# Altium PCB BMS_Carrier_Board.PcbDoc (part 3 of 3)
Units mm, origin at the board's own origin, x right, y up, seen from the top; angles counter-clockwise.
Board outline 80 x 70 mm, 2 copper layers (Top Layer, Bottom Layer); 98 components, 80 nets, 377 pads, 123 vias.
Unrouted connection lines stored in the file: 52.
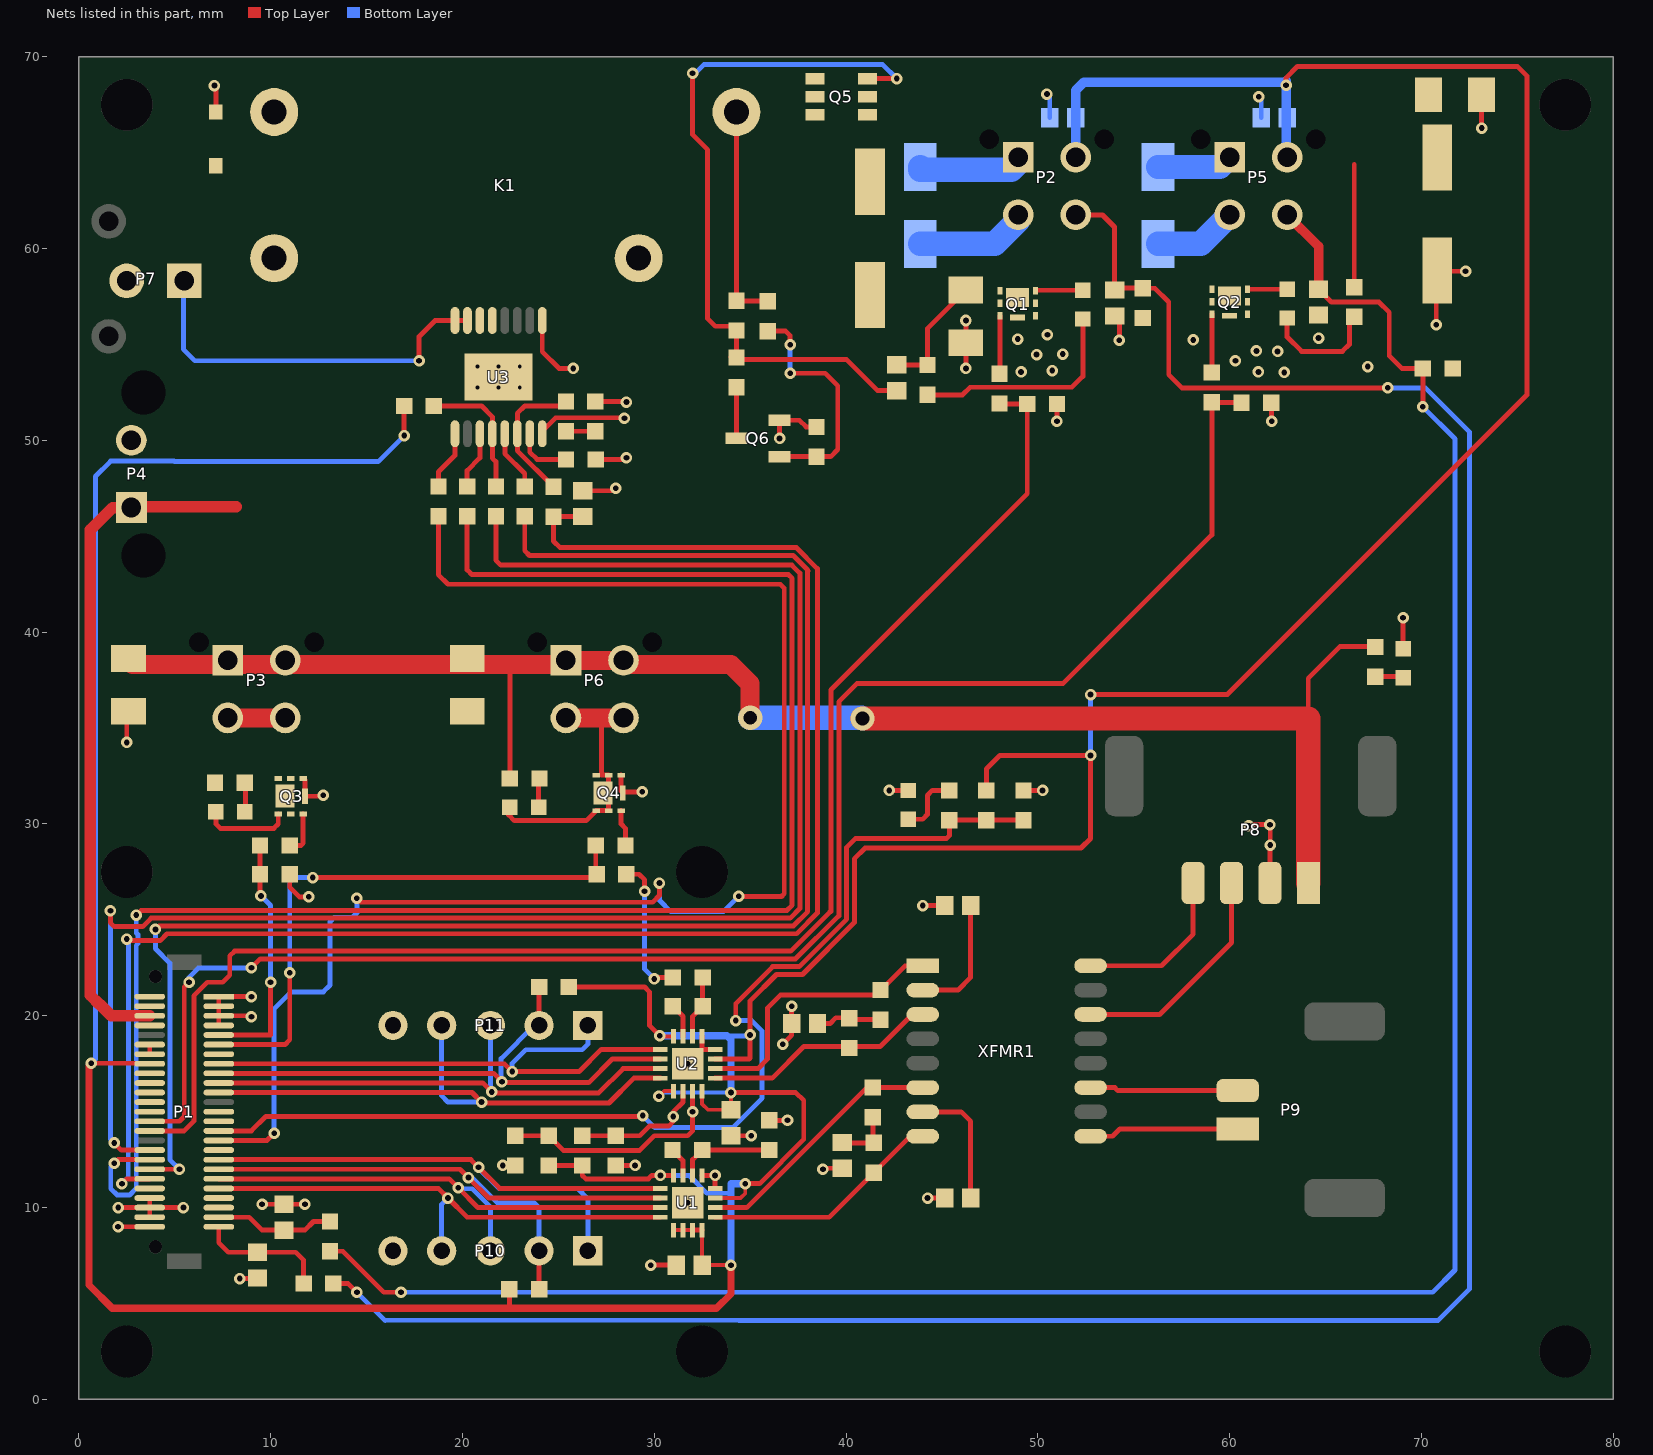
[diagram p2: the nets of this part, all layers, seen from the top]

## Via types
v1: diameter 0.6, hole 0.3, Top Layer to Bottom Layer, tented both sides, 115 vias
v2: diameter 0.5, hole 0.2, Top Layer to Bottom Layer, tented both sides, 6 vias
v3: diameter 1.27, hole 0.711, Top Layer to Bottom Layer, tented both sides, 2 vias

## Nets (pads, with @x,y where several pads share a name; then routed paths per layer and width w, separated by ;. In a path a pad name is that pad's centre, name@x,y a point inside that pad or via, vN(x,y) a via of type N, cw(c..) or ccw(c..) an arc to the next point about the centre after c; other vN are vias at no path point)
3V3: C1.1 C3.1 C15.1 C16.1 P1.40 P1.41 P1.42 P1.43 P1.44 P1.45 P2.3 P5.3 R1.1 R5.1 R9.1 R11.1 R12.1 R18.2 U1.5 U1.6 U1.7 U1.8 U1.11 U1.16 U2.5 U2.8 U2.11 U2.16 | length 277.4
  Top Layer w0.203: v1(30.25,15.8) 30.525,16.075 U2.5@31,16.075 ; v1(30.294,18.956) 30.325,18.925 U2.16@31,18.925 ; U1.5@31,8.825 U1.6@31.5,8.825 U1.7@32,8.825 ; U1.8@32.5,8.825 C1.1@32.5,7 v1(34,7) ; U2.8@32.5,16.075 32.5,15.4 32.8,15.1 C3.1@34,15.1 v1(34,16) ; U1.11@33.175,10.5 34.5,10.5 34.75,10.75 v1(34.75,11.25)
  Top Layer w0.25: v1(34,16) 37.385,16 37.798,15.587 37.798,13.555 35.492,11.25 v1(34.75,11.25)
  Top Layer w0.254: v1(0.653,17.53) 3.67,17.53 P1.43@3.7,17.5 ; P1.44@3.7,18 P1.45@3.7,18.5 ; v1(16.965,50.25) R18.2@16.965,51.791 ; R5.1@22.45,5.75 22.45,4.8 22.5,4.75 ; R12.1@24.5,12.2 R11.1@26.25,12.2 26.25,11.675 26.429,11.496 28.541,11.496 28.545,11.5 29.7,11.5 29.875,11.675 v1(30.325,11.675) U1.16@31,11.675 ; R9.1@25.55,21.5 29.5,21.5 29.75,21.25 29.75,19.5 v1(30.294,18.956) ; U1.7@32,8.825 U1.8@32.5,8.825 ; U2.11@33.175,17.75 34.95,17.75 35,17.8 v1(35,19) 35,20.778 36.377,22.155 37.73,22.155 40.438,24.863 40.438,28.188 41,28.75 52.254,28.75 52.75,29.246 v1(52.75,33.577) 48.027,33.577 47.319,32.869 R1.1@47.319,31.75 ; v1(52.75,36.75) 59.886,36.75 75.5,52.364 75.5,69 75,69.5 63.537,69.5 62.942,68.905 v1(62.942,68.52)
  Top Layer w0.381: v1(0.653,17.53) 0.533,17.411 0.533,5.967 1.75,4.75 22.5,4.75 33.25,4.75 34,5.5 v1(34,7)
  Bottom Layer w0.203: v1(30.25,15.8) 30.45,16 v1(34,16)
  Bottom Layer w0.254: v1(0.653,17.53) 0.871,17.748 0.871,48.128 1.664,48.921 4.97,48.921 5,48.89 15.605,48.89 v1(16.965,50.25) ; v1(30.325,11.675) 31.825,11.675 32.75,10.75 34,10.75 ; 33.794,18.956 34.956,18.956 v1(35,19) ; v1(52.75,33.577) v1(52.75,36.75)
  Bottom Layer w0.381: v1@30.25,18.912 v1(30.294,18.956) 33.794,18.956 34,18.75 v1(34,16) ; v1(34,7) 34,10.75 34,11.25 v1(34.75,11.25)
  Bottom Layer w0.5: P2.3@51.975,64.76 C16.1@51.975,66.82 51.975,68.25 52.407,68.682 v1@62.942,68.682 ; P5.3@62.942,65.28 v1@62.942,68.682 ; v1@62.942,68.741 v1@62.942,68.682
12V_CONTACTOR_COIL_SW: C5.1 C6.1 C7.1 C8.1 C12.1 D1.2 D3.2 P2.4 P5.4 Q5.1 Q5.2 Q5.5 Q5.6 R17.1 R28.1 | length 22.3
  Top Layer w0.25: C12.1@42.644,53.944 42.663,53.925 R17.1@44.25,53.925 44.25,55.836 C6.1@46.25,57.836 ; R28.1@66.5,57.86 66.5,64.4
  Top Layer w0.254: P2.4@48.95,64.45 P2.4@48.975,64.475
  Bottom Layer w1.27: D1.2@43.874,64.25 43.874,64.118 48.618,64.118 P2.4@48.975,64.475 ; D3.2@56.265,64.25 59.49,64.25 P5.4@60,64.76
12V_KILL_SW_to_Relay: D4.2 K1.1 P7.2
+12V: C9.1 C10.1 K1.2 P1.47 P1.48 P1.49 P1.50 P3.3 P3.4 P4.1 P6.3 P6.4 P8.1 R4.1 R32.1 R33.1 U3.13 U3.14 | length 122.6
  Top Layer w0.25: R33.1@22.475,32.375 22.475,38.223 22.56,38.308 ; 64.1,35.5 64.1,37.6 65.75,39.25 R4.1@67.482,39.25
  Top Layer w0.508: K1.2@28.935,58.679 K1.2@29.7,58.679
  Top Layer w0.6: P4.1@2.32,46.5 1.77,46.5 0.61,45.34 0.61,21.06 1.07,20.6 1.1,20.6 1.7,20 P1.48@3.7,20 ; P4.1@2.77,46.05 2.27,46.55 8.215,46.55
  Top Layer w1: C9.1@2.5,38.625 2.817,38.308 P3.4@7.768,38.308 ; P3.4@7.768,38.53 P3.4@7.768,38.308 ; v3(35,35.53) 35,37.308 34.001,38.308 28.4,38.308 P6.3@28.4,38.53 P6.4@25.4,38.53 25.178,38.308 22.56,38.308 P3.4@7.768,38.308
  Top Layer w1.27: v3(40.859,35.5) 64.1,35.5 P8.1@64.1,26.92
  Bottom Layer w1.27: v3(35,35.53) 40.829,35.53 v3(40.859,35.5)
CURR_ISOSPI_N: P8.3 XFMR1.14 | length 12
  Top Layer w0.254: XFMR1.14@52.75,20.07 56.352,20.07 60.1,23.818 P8.3@60.1,26.92
CURR_ISOSPI_P: P8.4 XFMR1.16 | length 8.7
  Top Layer w0.254: XFMR1.16@52.75,22.61 56.45,22.61 58.1,24.26 P8.4@58.1,26.92
CURR_N: R47.1 U2.9 XFMR1.3 | length 12.2
  Top Layer w0.254: U2.9@33.175,16.75 36.148,16.75 37.798,18.4 41.78,18.4 43.45,20.07 XFMR1.3@44,20.07
CURR_P: R10.1 U2.10 XFMR1.1 | length 14.6
  Top Layer w0.254: U2.10@33.175,17.25 35.41,17.25 35.913,17.753 35.913,20.413 36.579,21.079 41.554,21.079 43.085,22.61 XFMR1.1@44,22.61
GND: C1.2 C2.2 C3.2 C4.2 C5.2 C6.2 C7.2 C8.2 C9.2 C10.2 C11.2 C13.2 C14.2 C15.2 C16.2 C17.2 C18.2 C19.2 C20.2 D4.1 K1.5 LED1.2 LED2.2 P1.1 P1.2 P1.3 P1.4 P1.26 P1.27 P1.28 P1.29 P4.2 P8.2 P10.5 P11.5 Q1.4 Q1.8 Q2.4 Q2.8 Q3.4 Q3.8 Q4.4 Q4.8 Q6.2 R3.2 R8.2 R14.2 R15.2 R16.2 R21.2 R27.2 R29.2 R31.2 R36.2 R37.2 R41.2 R43.2 R45.2 U1.12 U1.13 U1.17 U2.12 U2.13 U2.17 U3.8 U3.9 U3.17 | length 82.9
  Top Layer w0.254: v1(2.049,9) P1.26@3.7,9 ; v1(2.061,10) P1.28@3.7,10 ; v1(2.5,34.25) C9.2@2.5,35.875 ; P1.27@3.7,9.5 P1.28@3.7,10 ; P1.29@3.7,10.5 P1.28@3.7,10 ; v1(5.455,10) P1.28@3.7,10 ; v1(7.075,68.5) 7.149,68.425 D4.1@7.149,67.12 ; P1.4@7.3,19.5 P1.3@7.3,20 ; v1(8.396,6.3) 9.299,6.3 C13.2@9.324,6.325 ; v1@8.976,19.951 8.971,19.951 8.923,20 P1.3@7.3,20 ; v1(9,21) P1.1@7.3,21 P1.2@7.3,20.5 P1.3@7.3,20 ; v1(9.557,10.17) 9.562,10.175 C17.2@10.7,10.175 v1(11.79,10.175) ; R36.2@11,27.38 11,26.701 11.5,26.201 v1(11.985,26.201) ; Q3.4@11.7,32.375 11.79,32.285 Q3.8@11.79,31.45 12.7,31.45 v1(12.75,31.5) ; v1(22.1,12.2) R15.2@22.75,12.2 ; U3.8@24.165,50.35 24.165,50.485 24.859,51.179 28.421,51.179 v1(28.45,51.15) ; U3.9@24.165,56.25 24.165,54.623 25.038,53.75 v1(25.775,53.75) ; C11.2@26.275,47.377 27.877,47.377 v1(28,47.5) ; R29.2@26.925,52.025 28.525,52.025 v1(28.55,52) ; R27.2@26.95,49.007 28.467,49.007 v1(28.55,49.09) ; R14.2@28,12.2 v1(29,12.2) ; Q4.4@28.275,32.545 28.275,31.71 Q4.8@28.365,31.62 28.42,31.675 v1(29.382,31.675) ; R37.2@28.55,27.38 29.207,27.38 29.5,27.087 v1(29.5,26.5) ; v1(29.826,7) C1.2@31.15,7 ; v1(30,21.925) 30.075,22 R16.2@30.975,22 ; v1(31.75,17.5) U2.17@32.5,18.25 ; U1.13@32.5,11.675 v1(33.175,11.675) U1.12@33.175,11 ; U2.13@32.5,18.925 U2.17@32.5,18.25 ; U2.12@33.175,18.25 U2.17@32.5,18.25 ; C3.2@34,13.75 v1(35.062,13.75) ; R8.2@36,14.55 v1(36.95,14.55) ; v1(36.538,50.1) Q6.2@36.538,51.05 37.569,51.05 37.919,50.7 R41.2@38.459,50.7 ; v1(36.7,18.52) 37.167,18.987 C20.2@37.167,19.6 37.167,20.491 v1(37.175,20.5) ; v1(38.8,12) 38.85,12.05 C19.2@39.8,12.05 ; v1(42.25,31.75) LED1.2@43.25,31.75 ; v1(44,25.75) C4.2@45.15,25.75 ; v1(44.25,10.5) C2.2@45.15,10.5 ; v1(46.25,53.75) C6.2@46.25,55.086 v1(46.25,56.25) ; R3.2@49.25,31.75 v1(50.25,31.75) ; v1(51,51) R21.2@51,51.9 ; v1(54.25,55.225) 54.264,55.239 C14.2@54.264,56.4 ; v1(61,29.9) 61.065,29.965 v1(62.1,29.965) 62.119,29.946 v1(62.119,28.9) 62.1,28.881 P8.2@62.1,26.92 ; R31.2@62.174,51.966 62.174,51.025 v1(62.199,51) ; LED2.2@69.045,39.133 v1(69.045,40.75) ; v1(70.773,56.028) C5.2@70.773,59.111 ; C5.2@70.824,58.85 70.858,58.816 v1(72.3,58.816) ; C8.2@73.125,68.02 73.125,66.309 v1(73.15,66.284)
  Bottom Layer w0.254: v1(29.5,26.5) 29.5,22.425 v1(30,21.925) ; v1(50.475,68.055) 50.625,67.905 C16.2@50.625,66.82 ; v1(61.52,67.916) 61.65,67.786 C15.2@61.65,66.82
  other v1: 31.75,10.25 9,19.951 62.849,53.541 49.125,53.566 61.5,53.566 50.75,53.642 67.2,53.85 60.3,54.15 49.936,54.473 51.3,54.5 62.5,54.638 61.399,54.663 58.1,55.234 48.95,55.284 64.64,55.336 50.5,55.505
  other v2: 20.79,52.75 21.89,52.75 22.99,52.75 20.79,53.85 21.89,53.85 22.99,53.85
I_N: R46.1 U1.9 XFMR1.8 | length 12.6
  Top Layer w0.254: U1.9@33.175,9.5 39.125,9.5 R46.1@41.45,11.825 43.345,13.72 XFMR1.8@44,13.72
I_P: R6.1 U1.10 XFMR1.6 | length 13.4
  Top Layer w0.254: U1.10@33.175,10 34.825,10 41.085,16.26 R6.1@41.4,16.26 XFMR1.6@44,16.26
ISOSPI_N: P9.1 XFMR1.9 | length 7.8
  Top Layer w0.254: XFMR1.9@52.75,13.72 53.894,13.72 54.274,14.1 P9.1@60.42,14.1
ISOSPI_P: P9.2 XFMR1.11 | length 7.7
  Top Layer w0.254: XFMR1.11@52.75,16.26 54.017,16.26 54.177,16.1 P9.2@60.42,16.1
NetC2_1: C2.1 XFMR1.7 | length 6.7
  Top Layer w0.254: XFMR1.7@44,14.99 46.01,14.99 46.5,14.5 C2.1@46.5,10.5
NetC4_1: C4.1 XFMR1.2 | length 6.5
  Top Layer w0.254: XFMR1.2@44,21.34 45.84,21.34 46.5,22 C4.1@46.5,25.75
NetC12_2: C12.2 Q5.3 R38.2 R39.1 | length 38.4
  Top Layer w0.254: v1(32,69.143) 32,65.934 32.785,65.149 32.785,56.349 33.182,55.952 34,55.952 34.288,55.664 34.288,54.638 34,54.35 34.141,54.209 40.031,54.209 41.646,52.594 C12.2@42.644,52.594 ; Q5.3@41.115,68.866 v1(42.644,68.866)
  Bottom Layer w0.254: v1(32,69.143) 32.143,69.143 32.594,69.594 41.916,69.594 v1(42.644,68.866)
NetC14_1: C14.1 P2.1 R42.2 R43.1 | length 134.8
  Top Layer w0.254: R42.2@13.275,6.04 14.048,6.04 v1(14.5,5.588) ; P2.1@51.975,61.475 52.25,61.75 53.374,61.75 54,61.124 54,57.95 R43.1@55.47,57.95 ; R43.1@55.47,57.934 56.105,57.934 56.825,57.214 56.825,53.425 57.511,52.739 v1(68.25,52.739)
  Bottom Layer w0.254: v1(14.5,5.588) 15.979,4.109 ; 15.979,4.129 34.392,4.129 ; 34.412,4.109 70.859,4.109 72.5,5.75 72.5,50.445 70.206,52.739 v1(68.25,52.739)
NetC18_1: C18.1 P5.1 R44.2 R45.1 | length 120.7
  Top Layer w0.25: C18.1@64.64,57.884 65.31,57.214 67.781,57.214 68.325,56.671 68.325,54.405 68.98,53.75 R45.1@70.075,53.75 v1(70.075,51.75)
  Top Layer w0.254: R44.2@13.1,7.725 13.774,7.725 15.911,5.588 v1(16.8,5.588)
  Top Layer w0.5: P5.1@63,61.76 64.64,60.12 C18.1@64.64,57.884
  Bottom Layer w0.254: v1(16.8,5.588) 70.588,5.588 71.75,6.75 71.75,46.25 71.75,50.075 v1(70.075,51.75)
NetC19_1: C19.1 R6.2 R46.2 | length 3
  Top Layer w0.254: C19.1@39.8,13.4 39.825,13.375 R46.2@41.45,13.375 41.4,13.425 R6.2@41.4,14.71
NetC20_1: C20.1 R10.2 R47.2 | length 3.1
  Top Layer w0.254: C20.1@38.517,19.6 39.17,19.6 39.47,19.9 40.07,19.9 40.17,19.8 R10.2@41.5,19.8
NetD1_1: D1.1 LED3.2 P2.2 Q1.1 Q1.2 Q1.5 Q1.6 Q1.7 | length 8.1
  Top Layer w0.25: Q1.6@49.875,57.8 49.9,57.825 LED3.2@52.349,57.825
  Bottom Layer w1.27: D1.1@43.874,60.25 47.75,60.25 P2.2@48.975,61.475
NetD3_1: D3.1 LED4.2 P5.2 Q2.1 Q2.2 Q2.5 Q2.6 Q2.7 | length 6.4
  Top Layer w0.25: Q2.6@60.925,57.884 LED4.2@63,57.884
  Bottom Layer w1.27: D3.1@56.265,60.25 58.49,60.25 P5.2@60,61.76
NetK1_3: K1.3 Q5.4 R38.1 R40.1 | length 11.2
  Top Layer w0.254: R38.1@34.288,57.275 R40.1@35.913,57.275 ; R38.1@34.288,57.502 K1.3@34.288,67.12
NetLED1_1: LED1.1 R2.2 | length 3.3
  Top Layer w0.254: LED1.1@43.25,30.25 44,30.25 44.25,30.5 44.25,31.5 44.5,31.75 R2.2@45.388,31.75
NetLED2_1: LED2.1 R4.2 | length 1.5
  Top Layer w0.254: R4.2@67.6,37.683 68.995,37.683 LED2.1@69.045,37.633
NetLED3_1: LED3.1 R17.2 | length 11.5
  Top Layer w0.254: R17.2@44.25,52.375 46.075,52.375 46.471,52.771 51.78,52.771 52.349,53.34 LED3.1@52.349,56.325
NetLED4_1: LED4.1 R28.2 | length 6.1
  Top Layer w0.254: LED4.1@63,56.384 63,55.389 63.75,54.638 65.88,54.638 66.25,55.008 R28.2@66.25,56.41
NetLED5_1: LED5.1 R32.2 | length 1.5
  Top Layer w0.254: LED5.1@8.686,30.817 R32.2@8.686,32.317
NetLED5_2: LED5.2 P3.1 P3.2 Q3.1 Q3.2 Q3.5 Q3.6 Q3.7 | length 7.6
  Top Layer w0.254: LED5.2@7.149,30.645 7.149,30.006 7.38,29.775 10.175,29.775 10.4,30 Q3.1@10.4,30.525
  Top Layer w1: P3.2@7.768,35.53 P3.1@10.768,35.53
NetLED6_1: LED6.1 R33.2 | length 1.5
  Top Layer w0.254: LED6.1@23.975,30.875 23.975,32.325 R33.2@24.025,32.375
NetLED6_2: LED6.2 P6.1 P6.2 Q4.1 Q4.2 Q4.5 Q4.6 Q4.7 | length 14.4
  Top Layer w0.254: LED6.2@22.475,30.875 22.475,30.536 22.414,30.475 22.714,30.175 26.455,30.175 Q4.1@26.975,30.695 Q4.2@27.625,30.695 27.625,31.32 Q4.7@27.325,31.62 27.625,31.92 Q4.5@27.625,32.545 27.25,32.545 27.25,35.53
  Top Layer w1: P6.2@25.4,35.53 27.25,35.53 P6.1@28.4,35.53
NetP7_1: P7.1 U3.15 U3.16 | length 20.3
  Top Layer w0.254: v1(17.74,54.15) 17.74,55.413 18.577,56.25 U3.16@19.615,56.25 U3.15@20.265,56.25
  Bottom Layer w0.254: P7.1@5.5,58.32 5.455,58.275 5.455,54.75 6.055,54.15 v1(17.74,54.15)
NetQ1_3: Q1.3 R20.2 | length 3
  Top Layer w0.254: R20.2@48,53.475 48.025,53.5 Q1.3@48.025,56.5
NetQ2_3: Q2.3 R30.2 | length 3
  Top Layer w0.254: R30.2@59.075,53.541 Q2.3@59.075,56.584
NetQ3_3: Q3.3 R34.1 | length 2.3
  Top Layer w0.254: R34.1@10.95,28.93 R34.1@11,28.88 11.58,28.88 11.7,29 Q3.3@11.7,30.525
NetQ4_3: Q4.3 R35.1 | length 2
  Top Layer w0.254: Q4.3@28.275,30.695 28.275,30 28.5,29.775 R35.1@28.5,28.88 R35.1@28.45,28.93
NetQ6_1: Q6.1 R39.2 | length 2.7
  Top Layer w0.254: Q6.1@34.288,50.1 R39.2@34.288,52.769
NetQ6_3: Q6.3 R40.2 R41.1 | length 12.5
  Top Layer w0.254: R40.2@35.913,55.697 36.853,55.697 37.088,55.462 v1(37.088,54.989) ; Q6.3@36.538,49.15 R41.1@38.459,49.15 39.196,49.15 39.571,49.525 39.571,52.838 38.909,53.5 v1(37.088,53.5)
  Bottom Layer w0.254: v1(37.088,53.5) v1(37.088,54.989)
NetR7_1: R7.1 U1.15 | length 1.6
  Top Layer w0.254: R7.1@30.95,13 31.5,12.45 U1.15@31.5,11.675
NetR7_2: R7.2 R8.1 U1.14 | length 5
  Top Layer w0.254: U1.14@32,11.675 32,12.5 R7.2@32.5,13 R8.1@36,13
NetR13_1: R13.1 U2.15 | length 1.8
  Top Layer w0.254: R13.1@30.975,20.5 31.5,19.975 U2.15@31.5,18.925
NetR13_2: R13.2 R16.1 U2.14 | length 3.3
  Top Layer w0.254: U2.14@32,18.925 32,19.975 R13.2@32.525,20.5 R16.1@32.525,22
NetR18_1: R18.1 R23.2 U3.4 | length 7.1
  Top Layer w0.254: R18.1@18.515,52 18.724,51.791 20.999,51.791 21.565,51.225 U3.4@21.565,50.35 21.565,49.075 21.75,48.89 R23.2@21.75,47.6
NetR19_2: R19.2 U3.1 | length 3.1
  Top Layer w0.254: R19.2@18.75,47.6 18.75,48.35 19.615,49.215 U3.1@19.615,50.35
NetR22_2: R22.2 U3.3 | length 3
  Top Layer w0.254: R22.2@20.25,47.6 20.25,48.425 20.915,49.09 U3.3@20.915,50.35
NetR24_2: R24.2 U3.5 | length 3.2
  Top Layer w0.254: U3.5@22.215,50.35 22.215,49.31 23.25,48.275 R24.2@23.25,47.6
NetR25_2: R25.2 R26.1 U3.6 | length 7.4
  Top Layer w0.254: R25.2@24.75,47.575 22.865,49.46 U3.6@22.865,50.35 22.865,51.406 23.25,51.791 25.166,51.791 R26.1@25.4,52.025
NetR26_2: R26.2 R29.1 | length 1.5
  Top Layer w0.254: R26.2@25.4,50.475 R29.1@26.925,50.475
NetR27_1: R27.1 U3.7 | length 3
  Top Layer w0.254: U3.7@23.515,50.35 23.515,49.385 23.893,49.007 R27.1@25.4,49.007
PA0_HV_PWR_RELAY_SENSE_MONITOR: C13.1 P1.25 R42.1 | length 6.9
  Top Layer w0.254: P1.25@7.3,9 7.3,8.176 7.801,7.675 C13.1@9.324,7.675 11.315,7.675 11.725,7.265 R42.1@11.725,6.04
PA1_HV_GND_RELAY_SENSE_MONITOR: C17.1 P1.24 R44.1 | length 6.3
  Top Layer w0.254: P1.24@7.3,9.5 8.882,9.5 9.557,8.825 C17.1@10.7,8.825 11.79,8.825 12.24,9.275 R44.1@13.1,9.275
PA2: P1.23
PA3/USART2_RX: P1.22
PA4/SPI1_NSS: P1.21 P10.4 U1.4 | length 26.5
  Top Layer w0.254: P1.21@7.3,11 18.75,11 v1(19.25,10.5) 20.25,9.5 U1.4@30.325,9.5
  Bottom Layer w0.254: P10.4@18.92,7.75 18.92,10.17 v1(19.25,10.5)
PA5/SPI1_SCK: P1.20 P10.3 U1.3 | length 28
  Top Layer w0.254: P1.20@7.3,11.5 19.314,11.5 v1(19.782,11.032) 20.814,10 U1.3@30.325,10
  Bottom Layer w0.254: v1(19.782,11.032) 19.829,10.985 20.515,10.985 21.46,10.04 P10.3@21.46,7.75
PA6/SPI1_MISO: P1.19 P10.2 R5.2 U1.2 | length 32.2
  Top Layer w0.254: P1.19@7.3,12 19.878,12 v1(20.314,11.564) 21.378,10.5 U1.2@30.325,10.5 ; R5.2@24,5.75 P10.2@24,7.75
  Bottom Layer w0.254: v1(20.314,11.564) 20.511,11.564 21.825,10.25 23.75,10.25 24,10 P10.2@24,7.75
PA7/SPI1_MOSI: P1.18 P10.1 U1.1 | length 32.8
  Top Layer w0.254: P1.18@7.3,12.5 20.442,12.5 v1(20.841,12.101) 21.942,11 U1.1@30.325,11
  Bottom Layer w0.254: v1(20.841,12.101) 20.841,12.065 21.906,11 26,11 26.54,10.46 P10.1@26.54,7.75
PA8: P1.7
PA9_FAN_2_PWM: P1.6 R35.2 R37.1 | length 29.8
  Top Layer w0.254: P1.6@7.3,18.5 10.75,18.5 11,18.75 v1(11,22.25) ; v1(12.199,27.204) 26.95,27.204 R35.2@26.95,28.88
  Bottom Layer w0.254: v1(11,22.25) 11,27 11.204,27.204 v1(12.199,27.204)
PA10_FAN_1_PWM: P1.5 R34.2 R36.1 | length 12.8
  Top Layer w0.254: P1.5@7.3,19 10,19 v1(10,21.75) ; R34.2@9.45,28.88 R36.1@9.45,27.38 9.45,26.3 v1(9.5,26.25)
  Bottom Layer w0.254: v1(9.5,26.25) 10,25.75 v1(10,21.75)
PA15: P1.39
PB0_MOSFET_SOFT_START_INPUT: P1.17
PB1_KILL_SWITCH_INPUT_1: P1.16 R19.1 | length 80.6
  Top Layer w0.254: P1.16@7.3,13.5 9.806,13.5 v1(10.188,13.882) ; v1(14.499,26.135) 14.713,25.921 29.916,25.921 30.275,26.28 v1(30.275,26.92) ; R19.1@18.75,46.025 18.75,43 19.25,42.5 36.581,42.5 36.781,42.3 36.781,26.363 36.636,26.218 v1@34.424,26.218
  Bottom Layer w0.254: v1(10.188,13.882) 10.188,20.357 11.081,21.25 12.75,21.25 13.1,21.6 13.1,24.917 13.318,25.135 14.274,25.135 14.499,25.36 v1(14.499,26.135) ; v1(30.275,26.92) 30.275,26.017 30.866,25.425 33.608,25.425 v1(34.412,26.23)
PB2_MASTER/SLAVE_SEL: P1.15 R1.2 R2.1 R3.1 | length 57.2
  Top Layer w0.254: P1.15@7.3,14 9,14 9.75,14.75 29.35,14.75 v1(29.4,14.8) ; v1(34.25,19.75) 34.25,20.639 36.173,22.562 37.562,22.562 40.032,25.032 40.032,28.782 40.5,29.25 45.25,29.25 45.388,29.388 R2.1@45.388,30.2 R1.2@47.319,30.2 R3.1@49.25,30.2
  Bottom Layer w0.254: v1(29.4,14.8) 30.029,14.171 34.095,14.171 35.625,15.7 35.625,19.205 35.08,19.75 v1(34.25,19.75)
PB3: P1.38
PB4_HV_GND_RELAY_EN: P1.37 R30.1 R31.1 | length 87.2
  Top Layer w0.254: P1.37@3.7,14.5 5.25,14.5 5.5,14.75 5.5,21.5 v1(5.75,21.75) ; v1(9,22.5) 9.468,22.968 37.368,22.968 39.6,25.2 39.626,25.2 39.626,36.376 40.579,37.329 50.567,37.329 51.329,37.329 59.075,45.075 R30.1@59.075,51.991 59.1,51.966 R31.1@60.624,51.966
  Bottom Layer w0.254: v1(5.75,21.75) 5.75,22 6.25,22.5 v1(9,22.5)
PB5_HV_PWR_RELAY_EN: P1.36 R20.1 R21.1 | length 76.8
  Top Layer w0.254: P1.36@3.7,14 5.25,14 5.5,14 6,14.5 6,21.045 6.705,21.75 7.5,21.75 7.874,22.124 7.874,23.124 8.124,23.374 8.874,23.374 37.114,23.374 39.17,25.43 ; 39.219,25.43 39.219,36.989 49.45,47.22 R21.1@49.45,51.9 48.025,51.9 R20.1@48,51.925
PB6_HSD_\F\A\U\L\T\: P1.34 R23.1 | length 87.3
  Top Layer w0.254: v1(1.65,25.475) 1.65,24.85 1.85,24.65 3.331,24.65 3.774,25.094 37.094,25.094 37.594,25.594 37.594,43.082 37.175,43.5 22,43.5 21.75,43.75 R23.1@21.75,46.05 R23.1@21.75,46.25 ; v1(1.85,13.375) 2.225,13 P1.34@3.7,13
  Bottom Layer w0.254: v1(1.65,25.475) 1.65,13.575 v1(1.85,13.375)
PB7_DIAG_EN: P1.33 R22.1 | length 90.8
  Top Layer w0.254: v1(1.85,12.317) 2.033,12.5 P1.33@3.7,12.5 ; v1(3,25.25) 3.25,25.5 36.925,25.5 37.187,25.762 37.187,42.813 37,43 20.5,43 20.25,43.25 R22.1@20.25,46.05 R22.1@20.25,46.25
  Bottom Layer w0.254: v1(1.85,12.317) 1.671,12.137 1.671,10.99 2.002,10.658 2.658,10.658 3,11 3,23.5 3,23.681 3.079,23.76 3.079,24.24 3,24.319 v1(3,25.25)
PB8_HSD_SEL: P1.32 R24.1 | length 83.9
  Top Layer w0.254: P1.32@3.7,12 v1(5.25,12) ; v1(4,24.5) 4.186,24.686 5.408,24.686 5.41,24.687 37.262,24.687 38,25.425 38,43.183 ; R24.1@23.25,46.25 R24.1@23.25,46.05 23.25,44.25 23.5,44 37.25,44 38.006,43.244 38.006,43.188 38.01,43.183
  Bottom Layer w0.254: v1(4,24.5) 4,23.5 4.75,22.75 4.75,12.5 v1(5.25,12)
PB9_HSD_CS: C11.1 P1.31 R25.1 | length 86.2
  Top Layer w0.254: v1(2.25,11.25) 2.5,11.5 P1.31@3.7,11.5 ; v1(2.5,24) 2.579,23.921 4.24,23.921 4.599,24.279 37.429,24.279 38.508,25.359 38.508,43.317 37.418,44.406 25.094,44.406 24.75,44.75 R25.1@24.75,46.025 R25.1@24.75,46.025 C11.1@26.275,46.027
  Bottom Layer w0.254: v1(2.25,11.25) 2.582,11.582 2.582,12.49 2.579,12.492 2.579,12.921 2.594,12.935 2.594,23.906 v1(2.5,24)
PB10/USART3_TX/I2C2_SCL: P1.14
PB11/USART3_RX/I2C2_SDA: P1.13
PB12/SPI2_NSS: P1.11 P11.4 U2.4 | length 29.7
  Top Layer w0.254: P1.11@7.3,16 20.5,16 v1(21,15.5) 21.047,15.453 27.645,15.453 28.942,16.75 U2.4@30.325,16.75
  Bottom Layer w0.254: P11.4@18.92,19.5 18.92,15.83 19.25,15.5 v1(21,15.5)
PB13/SPI2_SCK: P1.10 P11.3 U2.3 | length 27.3
  Top Layer w0.254: P1.10@7.3,16.5 21.064,16.5 v1(21.532,16.032) 21.579,15.985 27.113,15.985 28.378,17.25 U2.3@30.325,17.25
  Bottom Layer w0.254: P11.3@21.46,19.5 21.46,16.104 v1(21.532,16.032)
PB14/SPI2_MISO: P1.9 P11.2 R9.2 U2.2 | length 29.7
  Top Layer w0.254: P1.9@7.3,17 21.628,17 v1(22.064,16.564) 22.111,16.517 26.581,16.517 27.814,17.75 U2.2@30.325,17.75 ; P11.2@24,19.5 R9.2@24,21.5
  Bottom Layer w0.254: v1(22.064,16.564) 22.017,16.611 22.017,17.767 23.75,19.5 P11.2@24,19.5
PB15/SPI2_MOSI: P1.8 P11.1 U2.1 | length 29.4
  Top Layer w0.254: P1.8@7.3,17.5 22.192,17.5 v1(22.596,17.096) 26.096,17.096 27.25,18.25 U2.1@30.325,18.25
  Bottom Layer w0.254: v1(22.596,17.096) 22.596,17.521 23.305,18.23 26.25,18.23 26.54,18.52 P11.1@26.54,19.5
PC13: P1.30
PHA: R12.2 R15.1 U2.7 | length 12.1
  Top Layer w0.254: R15.1@22.75,13.75 R12.2@24.5,13.75 25.275,12.975 29.225,12.975 30,13.75 31.75,13.75 32,14 v1(32,15) U2.7@32,16.075
POL: R11.2 R14.1 U2.6 | length 6.8
  Top Layer w0.254: R11.2@26.25,13.75 R14.1@28,13.75 29.25,13.75 29.75,14.25 30.75,14.25 31,14.5 v1(31,14.75) 31,15 31.5,15.5 U2.6@31.5,16.075
pads on no net: P1. P1.12 P1.35 P1.46 P2. P3. P4. P5. P6. P7.0 P8.7 P9.3 U3.2 U3.10 U3.11 U3.12 XFMR1.4 XFMR1.5 XFMR1.10 XFMR1.12 XFMR1.13 XFMR1.15

## Polygon pours and split planes (outlines as drawn)
GND on Bottom Layer "GND_L02_P209" (solid, pour order 209): 0,0 0,70 80,70 80,0
NetLED6_2 on Top Layer "NONET_L01_P-001" (solid, pour order 204): 24.5,36.75 24.5,30 28.807,30 28.807,36.75
NetLED5_2 on Top Layer "NONET_L01_P-001" (solid, pour order 198): 9.557,36.75 9.557,30 11.175,30 11.4,29.775 11.675,30.05 11.675,36.75
+12V on Top Layer "NONET_L01_P-001" (solid, pour order 192): 59.404,56.584
NetD3_1 on Top Layer "NONET_L01_P-001" (solid, pour order 203): 57.11,62.952 57.11,56.725 59.05,56.725 60.466,56.725 61.45,56.725 61.45,62.952
+12V on Top Layer "+12V_L01_P207" (solid, pour order 207): 28.25,61.955 31.25,61.955 31.25,61.638 31.25,54.799 16.385,54.86 16.385,31.445 1.615,31.445 1.615,48.707 4.967,48.707 4.967,53.25 4.967,57.878 12.284,57.878 12.284,61.955 12.996,61.955 27.838,61.955
NetD1_1 on Top Layer "NONET_L01_P-001" (solid, pour order 193): 27.712,62.62
NetD1_1 on Top Layer "NETD1_1_L01_P199" (solid, pour order 199): 47.025,62.75 50.32,62.75 50.32,59.02 50.32,56.799 49.525,56.799 46.926,56.799 46.9,56.825 47.025,56.95 47.025,59.2
GND on Top Layer "GND_L01_P208" (solid, remove dead copper, pour order 208): 0,70 0,0 41.161,0 41.191,0.03 41.191,24.546 70.397,24.546 70.425,24.574 70.425,0.07 79.93,0.07 80,0 80,70
12V_CONTACTOR_COIL_SW on Top Layer "12V_CONTACTOR_COIL_SW_L01_P206" (solid, pour order 206): 37.418,68.416 37.418,65.5 39.75,65.5 39.75,61.75 42.02,61.75 42.02,56.144 42.164,56 46.9,56 46.9,62.5 47.494,63.094 50.624,63.094 50.624,66.116 50.674,66.166 55.95,66.166 55.95,63.465 61.52,63.465 61.5,63.485 68.741,63.465 68.741,69.143 68.741,62.5 71.75,62.5 71.75,69.75 43.75,69.75 43.874,69.626 43.874,68.416
NetK1_3 on Top Layer "NETK1_3_L01_P200" (solid, pour order 200): 39.5,68.416 37.418,68.416 35.75,66.747 35.75,65.25 32.5,65.25 32.5,69.75 39.5,69.75
12V_KILL_SW_to_Relay on Top Layer "12V_KILL_SW_TO_RELAY_L01_P205" (solid, pour order 205): 0.809,60.575 1.239,60.145 1.239,57.45 3.909,57.45 3.967,57.508 3.967,60.45 7.702,60.45 7.684,60.432 7.684,58.3 12.033,58.3 12.034,62.35 11.934,62.45 8.184,62.45 8.184,65.599 8.083,65.7 5.934,65.7
GND on Top Layer "GND_L01_P195" (solid, pour order 195): 29.24,33.216 29.24,30.9 33.075,30.9 33.075,33.216
+12V on Top Layer "+12V_L01_P196" (solid, pour order 196): 1.391,21.604 1.391,18.701 4.75,18.701 4.75,19 4.75,19.071 4.75,21.566
3V3 on Top Layer "3V3_L01_P197" (solid, pour order 197): 4.896,19.012 4.896,15.721 1.391,15.721 1.391,18.992
GND on Top Layer "GND_L01_P194" (solid, pour order 194): 11.24,33.054 11.24,30.825 11.315,30.75 13.329,30.75 13.329,33.048
NetLED6_2 on Top Layer "NETLED6_2_L01_P158" (solid, pour order 202): 27.5,37.62 30.5,37.62 30.5,30.1 27.5,30.1
NetLED5_2 on Top Layer "NETLED5_2_L01_P201" (solid, pour order 201): 9.25,37.5 12.25,37.5 12.25,30.25 9.25,30.25

## Keep-outs
Top Layer:
  lines w0.254: 0,0 0,60
Keep-Out Layer:
  lines w0.254: 80,69.919 80,0 0,0 ; 80,70 0,70 0,0 ; 0,0 0,0

## Other copper
Top Layer:
  pour cut-out: 41.191,24.546 41.191,0.03 70.385,0.03 70.425,0.07 70.425,24.574

## Silkscreen, mask and mechanical layers (free items; w line width, h text height)
Top Overlay:
  drawing of 23 lines, arcs and shapes, not listed
  text "HV POS RELAY" at 45.266,68.542 h0.8
  text "HV GND RELAY" at 57.012,68.542 h0.8
  text "KILL / SW" at 8.396,54.799 h0.8
  text "+12V" at 6.466,47.977 h0.8
  text "POWER" at 0.33,41.7 h0.8
  text "FAN 1 & 2" at 6.149,41 h0.8
  text "FAN 3 & 4" at 23.6,41 h0.8
  text "POWER LED" at 65.05,40.75 h0.8
  text "BMS / CURRENT SENSE" at 69.5,34 h0.8 r270
  text "LED1 / ON: MASTER BAT BOX / OFF: SLAVE BAT BOX" at 38.813,27 h0.8
  text "AFE isoSPI" at 61.775,8 h0.8
  text "MSXII BMS CARRIER BOARD / REV 4" at 36,5.431 h0.8
Bottom Overlay:
  text "GND" at 6.3,49.602 h0.8
  text "FAN 2 12V" at 11.237,47.216 h0.8 r90
  text "FAN 1 12V" at 8.19,47.177 h0.8 r90
  text "FAN 4 12V" at 26.039,46.75 h0.8 r90
  text "FAN 3 12V" at 29.089,46.75 h0.8 r90
  text "+12V" at 6.934,46.1 h0.8
  text "FAN 2 GND" at 11.132,34.481 h0.8 r90
  text "GND" at 14.549,34.481 h0.8 r90
  text "FAN 4 GND" at 25.877,34.481 h0.8 r90
  text "FAN 3 GND" at 29.382,34.481 h0.8 r90
  text "GND" at 32.799,34.481 h0.8 r90
  text "FAN 1 GND" at 8.061,34.457 h0.8 r90
  text "BMS ISENSE" at 22.75,21.169 h0.8
  text "GND" at 16.8,17.69 h0.8 r90
  text "NSS" at 19.381,17.69 h0.8 r90
  text "SCK" at 21.96,17.69 h0.8 r90
  text "MISO" at 24.423,17.69 h0.8 r90
  text "MOSI" at 27,17.69 h0.8 r90
  text "AFE" at 17.333,9.382 h0.8
  text "GND" at 16.8,5.94 h0.8 r90
  text "NSS" at 19.381,5.94 h0.8 r90
  text "SCK" at 21.96,5.94 h0.8 r90
  text "MISO" at 24.423,5.94 h0.8 r90
  text "MOSI" at 27,5.94 h0.8 r90

## Text inside footprints (layer, text, board x,y; h text height)
P7: Top Overlay "1" at 0.1,58.22 h0.8 r90